# Altium PCB Local Master.PcbDoc (part 1 of 2)
Units mm, origin at the board's own origin, x right, y up, seen from the top; angles counter-clockwise.
Board outline 94 x 42.5 mm, 2 copper layers (Top Layer, Bottom Layer); 184 components, 131 nets, 483 pads, 96 vias.
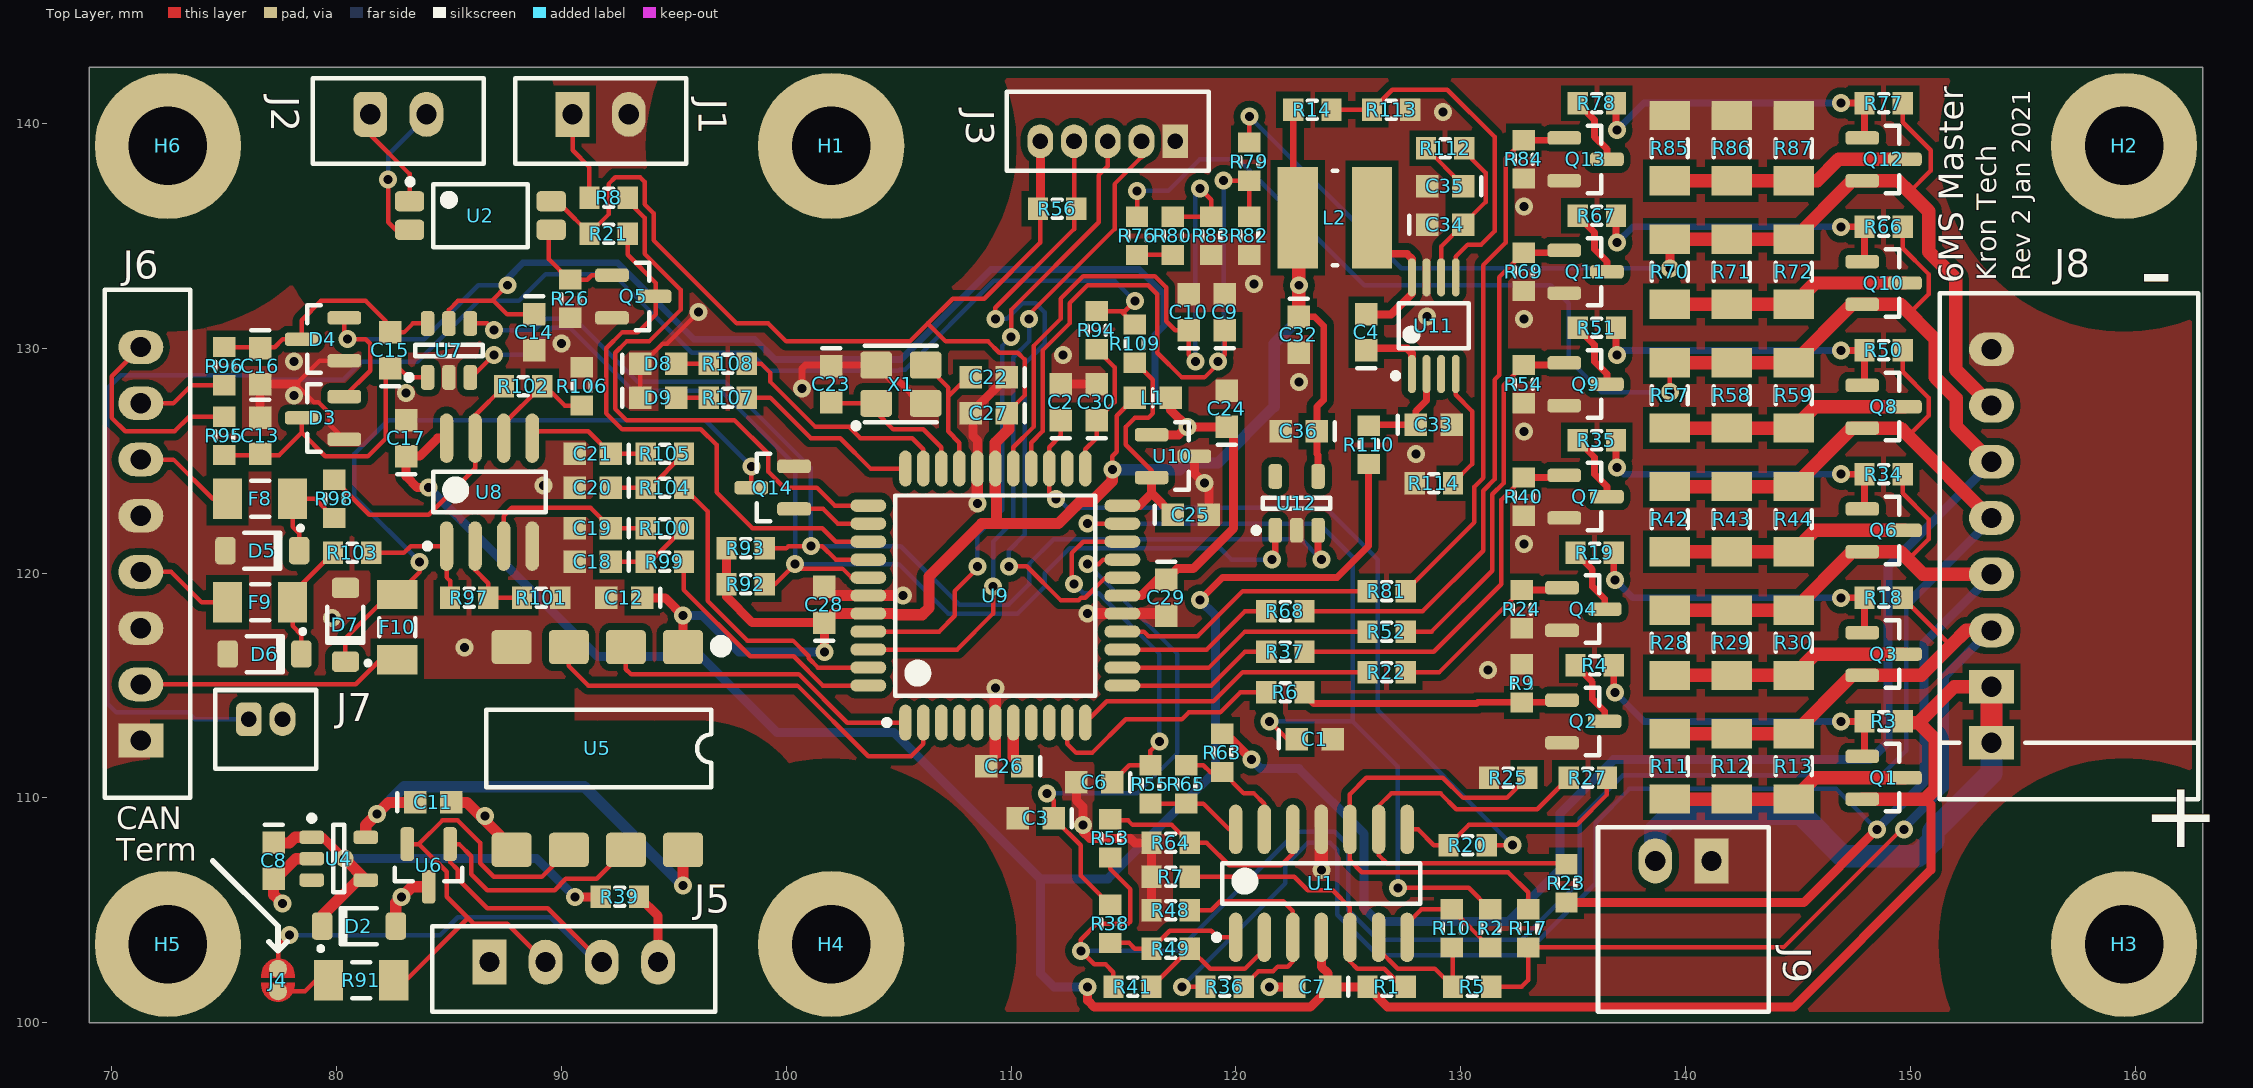
[diagram p0: Top Layer view]
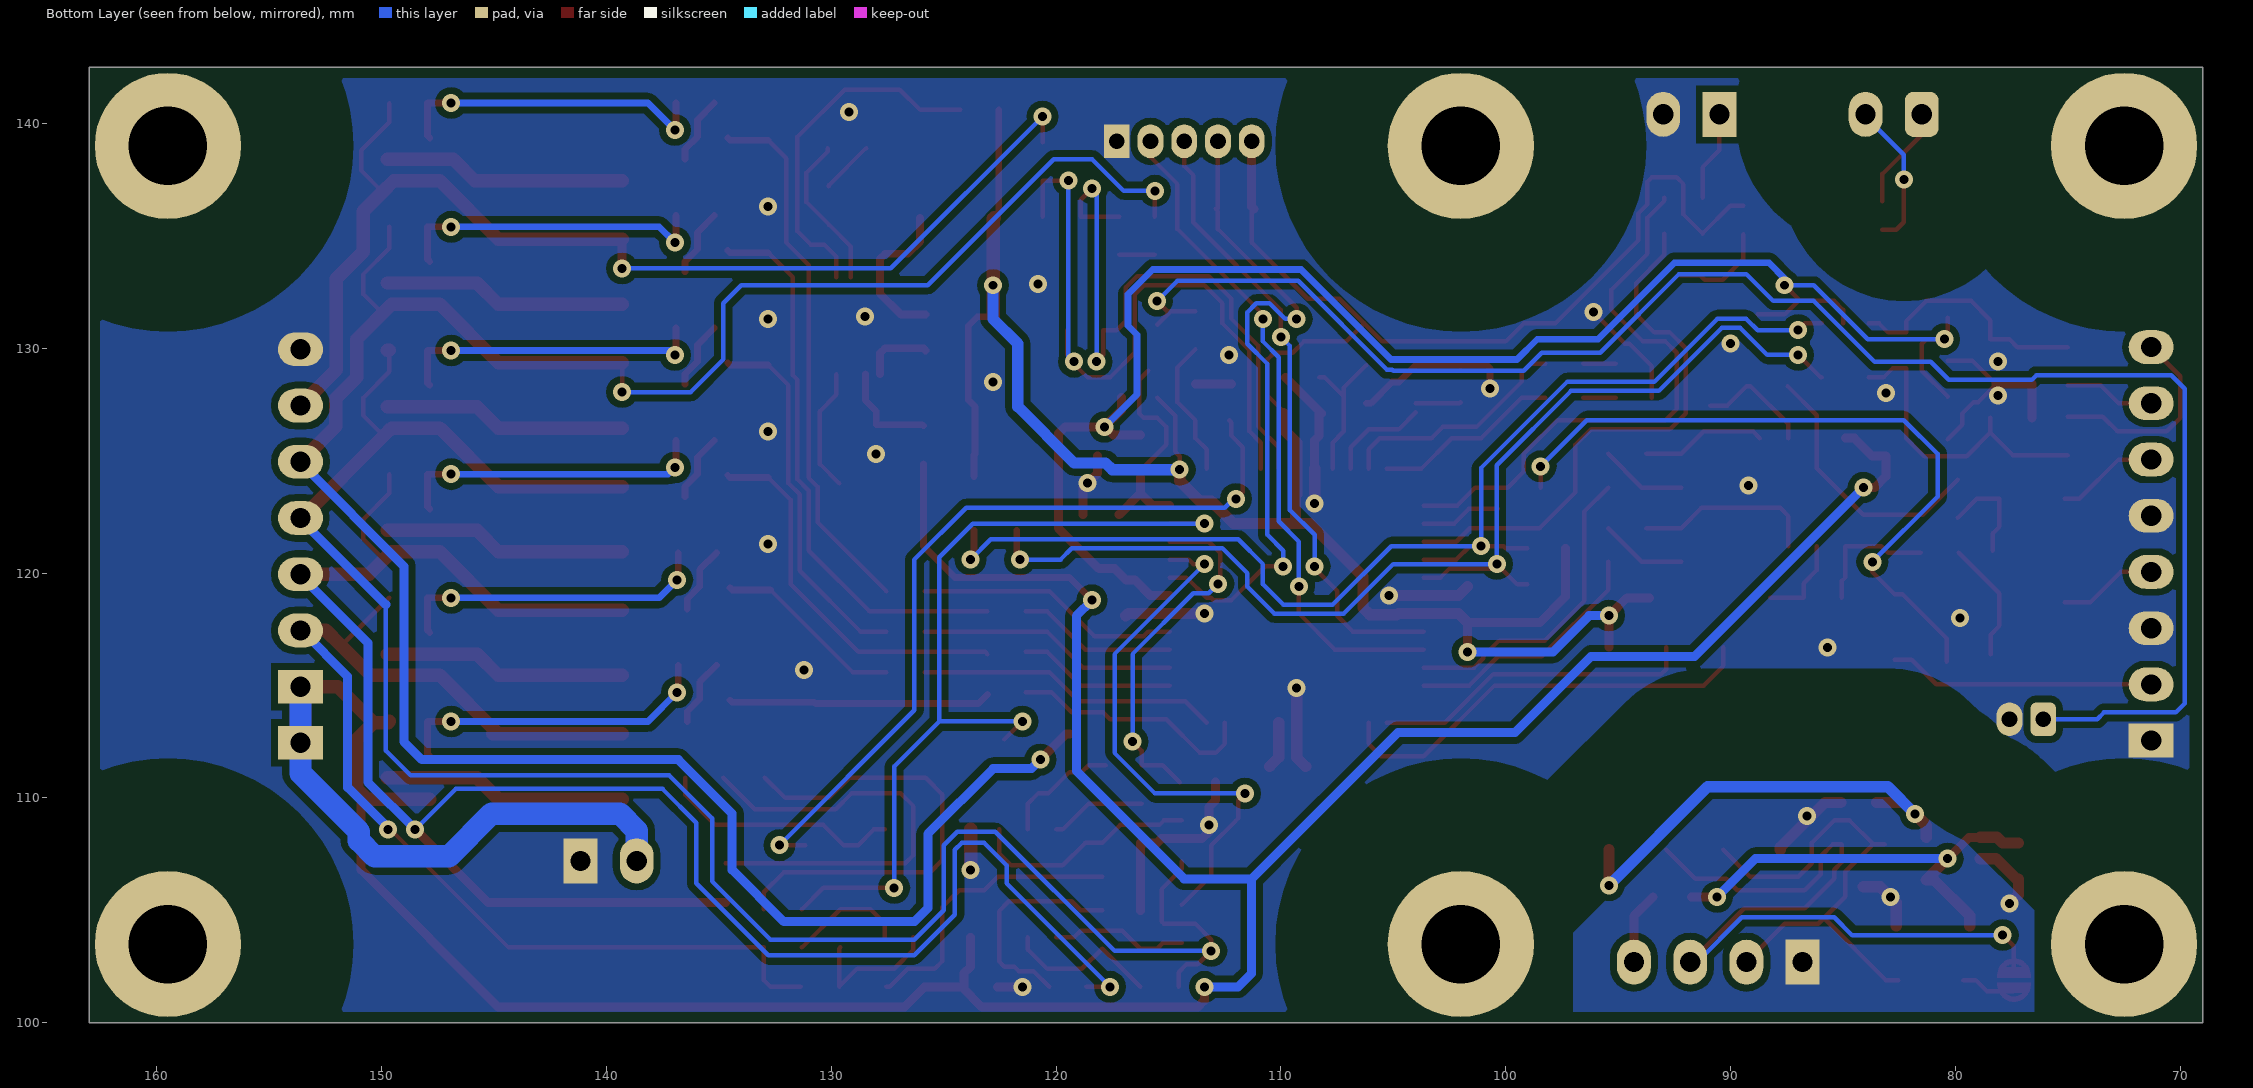
[diagram p1: Bottom Layer view, seen from below]

## Layer stack, top to bottom
Top Solder: solder mask 0.0102, Solder Resist, Dk 3.5
Top Layer: signal copper 0.0356
Dielectric1: dielectric 0.32, FR-4, Dk 4.8
Bottom Layer: signal copper 0.0356
Bottom Solder: solder mask 0.0102, Solder Resist, Dk 3.5

## Board outline
69,100 69,142.5 163,142.5 163,100

## Design rules (kind name [scope] priority, off if disabled: settings)
Clearance Clearance_HV [InNetClass('HV') vs NOT InNetClass('HV')] p1: gap=5 ignorepadtopadclearanceinfootprint=FALSE except(0: Arc-Hole Track-Hole SMDPad-Hole THPad-Hole Via-Hole Fill-Hole Poly-Hole Region-Hole Text-Hole)
Clearance Clearance_ISO [InNetClass('ISO') vs NOT InNetClass('ISO')] p2: gap=5 ignorepadtopadclearanceinfootprint=FALSE except(0: Arc-Hole Track-Hole SMDPad-Hole THPad-Hole Via-Hole Fill-Hole Poly-Hole Region-Hole Text-Hole)
Clearance Clearance_Plane [InPoly] p3: gap=0.3 ignorepadtopadclearanceinfootprint=FALSE except(0: Arc-Hole Track-Hole SMDPad-Hole THPad-Hole Via-Hole Fill-Hole Poly-Hole Region-Hole Text-Hole)
Clearance [All] p4: gap=0.2 ignorepadtopadclearanceinfootprint=FALSE except(0: Arc-Hole Track-Hole SMDPad-Hole THPad-Hole Via-Hole Fill-Hole Poly-Hole Region-Hole Text-Hole)
HoleSize [All] p1 off: absolutevalues=TRUE maxlimit=2.54 minlimit=0.025 maxpercent=80.000 minpercent=20.000
PolygonConnect PolygonConnect_Direct [IsVia    or (IsPad AND NOT OnLayer('Multi Layer'))] p1: connectstyle=Direct reliefconductorwidth=0.254 reliefentries=4 polygonreliefangle="90 Angle" airgapwidth=0.254
PolygonConnect [All] p2: connectstyle=Relief reliefconductorwidth=0.254 reliefentries=4 polygonreliefangle="90 Angle" airgapwidth=0.254
RoutingVias [All] p1: holewidth=0.3 width=0.6 viastyle="Through Hole" minholewidth=0.3 minwidth=0.6 maxholewidth=10 maxwidth=20
SilkToSilkClearance [All] p1 off: silktosilkclearance=0.254
SilkToSolderMaskClearance [IsPad] p1 off: minsilkscreentomaskgap=0.254 clearancetoexposedcopper=TRUE
SolderMaskExpansion [All] p1: expansion=0.102 istentingtop=FALSE
Width [All] p1: maxlimit=10 minlimit=0.2 preferedwidth=0.3
27 further rules are at their usual default settings.

## Classes and differential pairs
net class HV: ANALOG1 ANALOG1PWM ANALOG2 ANALOG2PWM AVDD BAL1 BAL2 BAL3 BAL4 BAL5 BAL6 CANRX CANTX CHGENABLE CHGENABLEDRV GND I2CCLK I2CDAT ICSPCLK ICSPDAT LEDG LEDR LOADEN1 LOADEN2 LOADEN3 LOADEN4 LOADEN5 LOADEN6 M\C\L\R\ NetC4_1 NetC4_2 NetC13_2 NetC15_2 NetC18_1 NetC19_1 NetC20_1 NetC21_1 NetC22_2 NetC23_2 NetC26_1 NetC33_1 NetC34_2 NetC35_1 NetD5_1 NetD6_1 NetD7_1 NetD8_2 NetD9_2 NetJ1_1 NetJ7_1 NetQ1_1 NetQ1_3 NetQ2_1 NetQ2_3 NetQ3_1 NetQ3_3 NetQ4_1 NetQ4_3 NetQ5_1 NetQ6_1 NetQ6_3 NetQ7_1 NetQ7_3 NetQ8_1 NetQ8_3 NetQ9_1 NetQ9_3 NetQ10_1 NetQ10_3 NetQ11_1 NetQ11_3 NetQ12_1 NetQ12_3 NetQ13_1 NetQ13_3 NetR1_2 NetR2_1 NetR5_2 NetR14_1 NetR17_2 NetR20_1 NetR23_2 NetR36_2 NetR38_1 NetR41_2 NetR53_2 NetR55_1 NetR63_2 NetR76_1 NetR97_1 NetR97_2 NetR98_1 NetR102_1 NetR114_2 NetU9_3 NetU9_4 NetU9_5 NetU9_8 NetU9_9 NetU9_24 NetU11_3 NetU12_5 RX SHUNT+ SHUNT- TEMPSENSE TX VBAT1 VBAT2 VBAT3 VBAT4 VBAT5 VBAT6 VCC VREF
net class LV: CANH CANL CANPWR CGND CVDD NetC8_1 NetJ4_1 NetU4_3
net class ISO: NetJ2_1 NetJ2_2
net class CHASSIS: CHASSIS1 CHASSIS2 CHASSIS3 CHASSIS4 CHASSIS5 CHASSIS6

## Components (designator, comment, footprint, x,y, rotation, side; value= is the part's Value field where it differs from the comment)
C1 "Cap Ceramic 0.1u 25V X7R 0603" CAPC1608N-0603 123.5,112.6 r0 top value=0.1u
C2 "Cap Ceramic 0.1u 25V X7R 0603" CAPC1608N-0603 112.2,127.6 r90 top value=0.1u
C3 "Cap Ceramic 0.1u 25V X7R 0603" CAPC1608N-0603 111.1,109.1 r180 top value=0.1u
C4 "Cap Ceramic 10n 50V X7R 0603" CAPC1608N-0603 125.8,130.7 r90 top value=10n
C6 "Cap Ceramic 0.1u 25V X7R 0603" CAPC1608N-0603 113.7,110.7 r180 top value=0.1u
C7 "Cap Ceramic 0.1u 50V X7R 0603" CAPC1608N-0603 123.4,101.6 r180 top value=0.1u
C8 "Cap Ceramic 0.1u 50V X7R 0603" CAPC1608N-0603 77.2,107.2 r270 top value=0.1u
C9 "Cap Ceramic 0.1u 25V X7R 0603" CAPC1608N-0603 119.5,131.6 r90 top value=0.1u
C10 "Cap Ceramic 0.1u 25V X7R 0603" CAPC1608N-0603 117.9,131.6 r90 top value=0.1u
C11 "Cap Ceramic 0.1u 25V X7R 0603" CAPC1608N-0603 84.3,109.8 r0 top value=0.1u
C12 "Cap Ceramic 0.1u 25V X7R 0603" CAPC1608N-0603 92.8,118.9 r180 top value=0.1u
C13 "Cap Ceramic 0.1u 25V X7R 0603" CAPC1608N-0603 76.6,126.1 r270 top value=0.1u
C14 "Cap Ceramic 1u 25V X5R 0603" CAPC1608N-0603 88.8,130.7 r270 top value=1u
C15 "Cap Ceramic 1u 25V X5R 0603" CAPC1608N-0603 82.4,129.9 r90 top value=1u
C16 "Cap Ceramic 0.1u 25V X7R 0603" CAPC1608N-0603 76.6,129.2 r270 top value=0.1u
C17 "Cap Ceramic 0.1u 50V X7R 0603" CAPC1608N-0603 83.1,126 r90 top value=0.1u
C18 "Cap Ceramic 1u 25V X5R 0603" CAPC1608N-0603 91.4,120.5 r180 top value=1u
C19 "Cap Ceramic 0.1u 25V X7R 0603" CAPC1608N-0603 91.4,122 r180 top value=0.1u
C20 "Cap Ceramic 1u 25V X5R 0603" CAPC1608N-0603 91.4,123.8 r180 top value=1u
C21 "Cap Ceramic 0.1u 25V X7R 0603" CAPC1608N-0603 91.4,125.3 r180 top value=0.1u
C22 "Cap Ceramic 20p 50V C0G 0603" CAPC1608N-0603 109,128.7 r180 top value=20p
C23 "Cap Ceramic 20p 50V C0G 0603" CAPC1608N-0603 102,128.4 r270 top value=20p
C24 "Cap Ceramic 0.1u 25V X7R 0603" CAPC1608N-0603 119.6,127.3 r90 top value=0.1u
C25 "Cap Ceramic 0.1u 25V X7R 0603" CAPC1608N-0603 118,122.6 r0 top value=0.1u
C26 "Cap Ceramic 10u 6.3V X5R 0603" CAPC1608N-0603 109.7,111.4 r180 top value=10uF
C27 "Cap Ceramic 0.1u 25V X7R 0603" CAPC1608N-0603 109,127.1 r180 top value=0.1u
C28 "Cap Ceramic 0.1u 25V X7R 0603" CAPC1608N-0603 101.7,118.6 r90 top value=0.1u
C29 "Cap Ceramic 1u 25V X5R 0603" CAPC1608N-0603 116.9,118.9 r270 top value=1u
C30 "Cap Ceramic 1u 25V X5R 0603" CAPC1608N-0603 113.8,127.6 r90 top value=1u
C32 "Cap Ceramic 10u 6.3V X5R 0603" CAPC1608N-0603 122.8,130.6 r270 top value=10uF
C33 "Cap Ceramic 1u 50V X5R 0603" CAPC1608N-0603 128.8,126.6 r0 top value=1u
C34 "Cap Ceramic 100pF 50V C0G 0402" CAPC1608N-0603 129.3,135.5 r0 top value=100pF
C35 "Cap Ceramic 0.1u 25V X7R 0603" CAPC1608N-0603 129.3,137.2 r180 top value=0.1u
C36 "Cap Ceramic 0.1u 25V X7R 0603" CAPC1608N-0603 122.8,126.3 r180 top value=0.1u
D2 "Diode Zener 24V 0.5W SOD-123" SOD-123 81,104.3 r0 top value=24V
D3 "Diode Schottky 200mA 30V Series SOT-23" SOT23-3N 79.4,126.9 r180 top value="200mA 30V"
D4 "Diode Schottky 200mA 30V Series SOT-23" SOT23-3N 79.4,130.4 r180 top value="200mA 30V"
D5 "Diode Zener 10V 0.5W SOD-123" SOD-123 76.7,121 r180 top value=10V
D6 "Diode Zener 10V 0.5W SOD-123" SOD-123 76.8,116.4 r180 top value=10V
D7 "Diode Zener 10V 0.5W SOD-123" SOD-123 80.4,117.7 r90 top value=10V
D8 "LED Red 160° 0603" CAPC1608N-0603 94.3,129.3 r0 top value="LS Q971-KN-1"
D9 "LED Green 160° 0603" CAPC1608N-0603 94.3,127.8 r0 top value="LG Q971-KN-1"
F8 "Fuse PTC 50mA 60V 1206" RESC3216N-1206 76.6,123.3 r180 top value=50mA
F9 "Fuse PTC 50mA 60V 1206" RESC3216N-1206 76.6,118.7 r180 top value=50mA
F10 "Fuse PTC 50mA 60V 1206" RESC3216N-1206 82.7,117.6 r270 top value=50mA
H1 "Mounting Hole" "HOLE MOUNTING 3MM"#1 103.2,138.6 r0 top
H2 "Mounting Hole" "HOLE MOUNTING 3MM"#2 160.7,138.8 r0 top
H3 "Mounting Hole" "HOLE MOUNTING 3MM"#3 188.4,105.6 r0 top
H4 "Mounting Hole" "HOLE MOUNTING 3MM"#4 102.7,103.4 r0 top
H5 "Mounting Hole" "HOLE MOUNTING 3MM"#5 72.5,103.5 r0 top
H6 "Mounting Hole" "HOLE MOUNTING 3MM"#5 72.5,139 r0 top
J1 "Conn Header 2.5mm Vert 2-Pos EH" B2B-EH#1 91.75,140.4 r0 top value=B2B-EH-A(LF)(SN)
J2 "Conn Header 2.5mm Vert 2-Pos EH" B2B-EH#2 82.75,140.4 r0 top value=B2B-EH-A(LF)(SN)
J3 "Conn Header 1.5mm Vert 5-Pos ZH" B5B-ZR 114.3,139.2 r180 top value=B5B-ZR(LF)(SN)
J4 "Jumper Solder Blob" "JUMPER SOLDER BLOB" 77.4,101.9 r90 top
J5 "Conn Header 2.5mm Vert 4-Pos EH" B4B-EH 90.55,102.7 r0 top value=B4B-EH-A(LF)(SN)
J6 "Conn Header 2.5mm Vert 8-Pos EH" B8B-EH 71.3,121.3 r90 top value=B8B-EH-A(LF)(SN)
J7 "Conn Header 1.5mm Vert 2-Pos ZH" B2B-ZR 76.85,113.5 r0 top value=B2B-ZR(LF)(SN)
J8 "Conn Header 2.5mm RA 7-Pos XH" S7B-XH&78B-XH-REV 153.6,122.45 r270 top value=S7B-XH-A(LF)(SN)
J9 "Conn Header 2.5mm RA 2-Pos EH" S2B-EH 139.9,107.2 r180 top value=S2B-EH(LF)(SN)
L1 "Ind Bead 600R 1A 0603" INDC1608N-0603 116.3,127.8 r0 top value=600R
L2 "Ind 1mH 90mA SDR0403-102KL" SDR0403 124.4,135.8 r180 top value="1mH 90mA"
Q1 "Tran PNP Darl 30V 500mA SOT-23" SOT23-3N 148.8,110.9 r0 top value=MMBTA64-7-F
Q2 "Tran NPN 40V 200mA SOT-23" SOT23-3N 135.45,113.4 r0 top value=MMBT3904
Q3 "Tran PNP Darl 30V 500mA SOT-23" SOT23-3N 148.8,116.4 r0 top value=MMBTA64-7-F
Q4 "Tran NPN 40V 200mA SOT-23" SOT23-3N 135.45,118.4 r0 top value=MMBT3904
Q5 "Tran NPN 40V 200mA SOT-23" SOT23-3N 93.2,132.3 r0 top value=MMBT3904
Q6 "Tran PNP Darl 30V 500mA SOT-23" SOT23-3N 148.8,121.9 r0 top value=MMBTA64-7-F
Q7 "Tran NPN 40V 200mA SOT-23" SOT23-3N 135.55,123.4 r0 top value=MMBT3904
Q8 "Tran PNP Darl 30V 500mA SOT-23" SOT23-3N 148.8,127.4 r0 top value=MMBTA64-7-F
Q9 "Tran NPN 40V 200mA SOT-23" SOT23-3N 135.55,128.4 r0 top value=MMBT3904
Q10 "Tran PNP Darl 30V 500mA SOT-23" SOT23-3N 148.8,132.9 r0 top value=MMBTA64-7-F
Q11 "Tran NPN 40V 200mA SOT-23" SOT23-3N 135.55,133.4 r0 top value=MMBT3904
Q12 "Tran PNP Darl 30V 500mA SOT-23" SOT23-3N 148.8,138.4 r0 top value=MMBTA64-7-F
Q13 "Tran NPN 40V 200mA SOT-23" SOT23-3N 135.55,138.4 r0 top value=MMBT3904
Q14 "Tran N-MOSFET 60V 115mA SOT-23" SOT23-3N 99.4,123.8 r180 top value=2N7002
R1 "Res 499K 1/10W 1% 0603" RESC1608N-0603 126.7,101.6 r0 top value=499K
R2 "Res 10.0K 1/10W 1% 0603" RESC1608N-0603 131.3,104.2 r90 top value=10K0
R3 "Res 100K 1/10W 1% 0603" RESC1608N-0603 148.8,113.4 r0 top value=100K
R4 "Res 280K 1/10W 1% 0603" RESC1608N-0603 135.95,115.9 r180 top value=280K
R5 "Res 499K 1/10W 1% 0603" RESC1608N-0603 130.5,101.6 r180 top value=499K
R6 "Res 10.0K 1/10W 1% 0603" RESC1608N-0603 122.2,114.7 r180 top value=10K0
R7 "Res 200K 1/10W 1% 0603" RESC1608N-0603 117.1,106.5 r0 top value=200K
R8 "Res 1.00K 1/10W 1% 0603" RESC1608N-0603 92.1,136.7 r0 top value=1K00
R9 "Res 10.0K 1/10W 1% 0603" RESC1608N-0603 132.7,115.1 r270 top value=10K0
R10 "Res 200K 1/10W 1% 0603" RESC1608N-0603 129.6,104.2 r90 top value=200K
R11 "Res 121R 1/4W 1% 1206" RESC3216N-1206 139.3,111.4 r270 top value=121R
R12 "Res 121R 1/4W 1% 1206" RESC3216N-1206 142.05,111.4 r270 top value=121R
R13 "Res 121R 1/4W 1% 1206" RESC3216N-1206 144.8,111.4 r270 top value=121R
R14 "Res 31.6K 1/10W 1% 0603" RESC1608N-0603 123.4,140.6 r180 top value=31K6
R17 "Res 499K 1/10W 1% 0603" RESC1608N-0603 133,104.2 r90 top value=499K
R18 "Res 100K 1/10W 1% 0603" RESC1608N-0603 148.8,118.9 r0 top value=100K
R19 "Res 280K 1/10W 1% 0603" RESC1608N-0603 135.95,120.9 r180 top value=280K
R20 "Res 10.0K 1/10W 1% 0603" RESC1608N-0603 130.3,107.9 r0 top value=10K0
R21 "Res 2.32K 1/10W 1% 0603" RESC1608N-0603 92.1,135.1 r180 top value=2K32
R22 "Res 10.0K 1/10W 1% 0603" RESC1608N-0603 126.7,115.6 r180 top value=10K0
R23 "Res 499K 1/10W 1% 0603" RESC1608N-0603 134.7,106.2 r90 top value=499K
R24 "Res 10.0K 1/10W 1% 0603" RESC1608N-0603 132.7,118.4 r90 top value=10K0
R25 "Res 200K 1/10W 1% 0603" RESC1608N-0603 132.1,110.9 r0 top value=200K
R26 "Res 4.99K 1/10W 1% 0603" RESC1608N-0603 90.4,132.2 r90 top value=4K99
R27 "Res 200K 1/10W 1% 0603" RESC1608N-0603 135.65,110.9 r0 top value=200K
R28 "Res 121R 1/4W 1% 1206" RESC3216N-1206 139.3,116.9 r270 top value=121R
R29 "Res 121R 1/4W 1% 1206" RESC3216N-1206 142.05,116.9 r270 top value=121R
R30 "Res 121R 1/4W 1% 1206" RESC3216N-1206 144.8,116.9 r270 top value=121R
R34 "Res 100K 1/10W 1% 0603" RESC1608N-0603 148.8,124.4 r0 top value=100K
R35 "Res 280K 1/10W 1% 0603" RESC1608N-0603 136.05,125.9 r180 top value=280K
R36 "Res 499K 1/10W 1% 0603" RESC1608N-0603 119.5,101.6 r0 top value=499K
R37 "Res 10.0K 1/10W 1% 0603" RESC1608N-0603 122.2,116.5 r180 top value=10K0
R38 "Res 10.0K 1/10W 1% 0603" RESC1608N-0603 114.4,104.4 r90 top value=10K0
R39 "Res 120R 1/10W 1% 0603" RESC1608N-0603 92.6,105.6 r0 top value=120R
R40 "Res 10.0K 1/10W 1% 0603" RESC1608N-0603 132.8,123.4 r90 top value=10K0
R41 "Res 499K 1/10W 1% 0603" RESC1608N-0603 115.4,101.6 r0 top value=499K
R42 "Res 121R 1/4W 1% 1206" RESC3216N-1206 139.3,122.4 r270 top value=121R
R43 "Res 121R 1/4W 1% 1206" RESC3216N-1206 142.05,122.4 r270 top value=121R
R44 "Res 121R 1/4W 1% 1206" RESC3216N-1206 144.8,122.4 r270 top value=121R
R48 "Res 200K 1/10W 1% 0603" RESC1608N-0603 117.1,105 r0 top value=200K
R49 "Res 200K 1/10W 1% 0603" RESC1608N-0603 117.1,103.3 r180 top value=200K
R50 "Res 100K 1/10W 1% 0603" RESC1608N-0603 148.8,129.9 r0 top value=100K
R51 "Res 100K 1/10W 1% 0603" RESC1608N-0603 136.05,130.9 r180 top value=100K
R52 "Res 10.0K 1/10W 1% 0603" RESC1608N-0603 126.7,117.4 r180 top value=10K0
R53 "Res 499K 1/10W 1% 0603" RESC1608N-0603 114.4,108.2 r90 top value=499K
R54 "Res 10.0K 1/10W 1% 0603" RESC1608N-0603 132.8,128.4 r90 top value=10K0
R55 "Res 10.0K 1/10W 1% 0603" RESC1608N-0603 116.2,110.6 r90 top value=10K0
R56 "Res 10.0K 1/10W 1% 0603" RESC1608N-0603 112.05,136.2 r180 top value=10K0
R57 "Res 121R 1/4W 1% 1206" RESC3216N-1206 139.3,127.9 r270 top value=121R
R58 "Res 121R 1/4W 1% 1206" RESC3216N-1206 142.05,127.9 r270 top value=121R
R59 "Res 121R 1/4W 1% 1206" RESC3216N-1206 144.8,127.9 r270 top value=121R
R63 "Res 499K 1/10W 1% 0603" RESC1608N-0603 119.4,112 r270 top value=499K
R64 "Res 200K 1/10W 1% 0603" RESC1608N-0603 117.1,108 r0 top value=200K
R65 "Res 200K 1/10W 1% 0603" RESC1608N-0603 117.8,110.6 r270 top value=200K
R66 "Res 100K 1/10W 1% 0603" RESC1608N-0603 148.8,135.4 r0 top value=100K
R67 "Res 100K 1/10W 1% 0603" RESC1608N-0603 136.05,135.9 r180 top value=100K
R68 "Res 10.0K 1/10W 1% 0603" RESC1608N-0603 122.2,118.3 r180 top value=10K0
R69 "Res 10.0K 1/10W 1% 0603" RESC1608N-0603 132.8,133.4 r90 top value=10K0
R70 "Res 121R 1/4W 1% 1206" RESC3216N-1206 139.3,133.4 r270 top value=121R
R71 "Res 121R 1/4W 1% 1206" RESC3216N-1206 142.05,133.4 r270 top value=121R
R72 "Res 121R 1/4W 1% 1206" RESC3216N-1206 144.8,133.4 r270 top value=121R
R76 "Res 100K 1/10W 1% 0603" RESC1608N-0603 115.6,135 r90 top value=100K
R77 "Res 100K 1/10W 1% 0603" RESC1608N-0603 148.8,140.9 r0 top value=100K
R78 "Res 3.32K 1/10W 1% 0603" RESC1608N-0603 136.05,140.9 r180 top value=3K32
R79 "Res 150K 1/10W 1% 0603" RESC1608N-0603 120.6,138.3 r90 top value=150K
R80 "Res 280K 1/10W 1% 0603" RESC1608N-0603 117.2,135 r270 top value=280K
R81 "Res 10.0K 1/10W 1% 0603" RESC1608N-0603 126.7,119.2 r180 top value=10K0
R82 "Res 100K 1/10W 1% 0603" RESC1608N-0603 120.6,135 r90 top value=100K
R83 "Res 100K 1/10W 1% 0603" RESC1608N-0603 118.9,135 r90 top value=100K
R84 "Res 10.0K 1/10W 1% 0603" RESC1608N-0603 132.8,138.4 r90 top value=10K0
R85 "Res 121R 1/4W 1% 1206" RESC3216N-1206 139.3,138.9 r270 top value=121R
R86 "Res 121R 1/4W 1% 1206" RESC3216N-1206 142.05,138.9 r270 top value=121R
R87 "Res 121R 1/4W 1% 1206" RESC3216N-1206 144.8,138.9 r270 top value=121R
R91 "Res 121R 1/4W 1% 1206" RESC3216N-1206 81.1,101.9 r180 top value=121R
R92 "Res 10.0K 1/10W 1% 0603" RESC1608N-0603 98.2,119.5 r180 top value=10K0
R93 "Res 10.0K 1/10W 1% 0603" RESC1608N-0603 98.2,121.1 r180 top value=10K0
R94 "Res 10.0K 1/10W 1% 0603" RESC1608N-0603 113.8,130.8 r90 top value=10K0
R95 "Res 499R 1/10W 1% 0603" RESC1608N-0603 75,126.1 r270 top value=499R
R96 "Res 499R 1/10W 1% 0603" RESC1608N-0603 75,129.2 r90 top value=499R
R97 "Res 66.5K 1/10W 1% 0603" RESC1608N-0603 85.9,118.9 r180 top value=66K5
R98 "Res 100R 1/10W 1% 0603" RESC1608N-0603 79.9,123.3 r270 top value=100R
R99 "Res 10.0K 1/10W 1% 0603" RESC1608N-0603 94.6,120.5 r180 top value=10K0
R100 "Res 100K 1/10W 1% 0603" RESC1608N-0603 94.6,122 r180 top value=100K
R101 "Res 100K 1/10W 1% 0603" RESC1608N-0603 89.1,118.9 r180 top value=100K
R102 "Res 66.5K 1/10W 1% 0603" RESC1608N-0603 88.3,128.3 r180 top value=66K5
R103 "Res 100R 1/10W 1% 0603" RESC1608N-0603 80.7,120.9 r180 top value=100R
R104 "Res 10.0K 1/10W 1% 0603" RESC1608N-0603 94.6,123.8 r180 top value=10K0
R105 "Res 100K 1/10W 1% 0603" RESC1608N-0603 94.6,125.3 r180 top value=100K
R106 "Res 100K 1/10W 1% 0603" RESC1608N-0603 90.9,128.3 r270 top value=100K
R107 "Res 120R 1/10W 1% 0603" RESC1608N-0603 97.4,127.8 r180 top value=120R
R108 "Res 120R 1/10W 1% 0603" RESC1608N-0603 97.4,129.3 r180 top value=120R
R109 "Res 10.0K 1/10W 1% 0603" RESC1608N-0603 115.5,130.2 r270 top value=10K0
R110 "Res 120R 1/10W 1% 0603" RESC1608N-0603 125.9,125.7 r90 top value=120R
R112 "Res 10.0K 1/10W 1% 0603" RESC1608N-0603 129.3,138.9 r180 top value=10K0
R113 "Res 10.0K 1/10W 1% 0603" RESC1608N-0603 126.9,140.6 r180 top value=10K0
R114 "Res 499K 1/10W 1% 0603" RESC1608N-0603 128.8,124 r0 top value=499K
U1 "IC Op-Amp Low Power RRIO 32V 14-SOIC" SOIC127P600-14N 123.8,106.2 r90 top value=LP324DR
U2 "IC Optocoupler Bi-Di LED 80-300% SOIC4" MFP127P4.4-4 86.4,135.9 r0 top value=80-300%
U4 "IC Voltage Reg LDO 5V SOT-23-5" SOT23-5N 80.1,107.3 r0 top value=5V
U5 "IC Driver CAN 8-SOIC" SMD-8 91.6,112.2 r270 top value=ISO1050DUBR
U6 "IC ESD Protector CAN SOT23" SOT23-3N 84.1,107 r270 top value=PESD1CAN,215
U7 "MCP3425A0T-E/CH" SOT23-6N 85,129.9 r90 top
U8 "IC Op-Amp Low Power RRIO 32V 8-SOIC" SOIC127P600-8N 86.8,123.6 r90 top
U9 "IC Micro DSPIC33EP32GP504-I/PT 44-TQFP" TQFP44-0.8 109.3,119 r90 top value=DSPIC33EP32GP504-I/PT
U10 "IC Voltage Ref 2.048V 0.3% uPwr SOT-23" SOT23-3N 117.2,125.2 r0 top value=2.048V
U11 "IC Reg Buck 4.7-60V 50mA 8-MSOP" MSOP65P3.0-8N 128.8,131 r90 top value=TPS54062DGKR
U12 "IC Mem EEPROM 16Kb (2K x 8) I2C SOT-23-5" SOT23-5N 122.7,123.1 r90 top value=24LC16BT-I/OT
X1 "Xtal 20MHz 10pF 3.2X2.5MM" XTAL3.2X2.5 105.1,128.4 r0 top value=20MHz

## Footprints (in the part's own frame and the unit in brackets; to place one, negate y for a bottom-side part, rotate by r counter-clockwise, add the part's x,y. Pads: shape width x height; smd on the part's side, far side on the other; paste and mask are expansions set on the pad)
B2B-EH#1 [mm] "CONN HEADER EH TOP 2POS 2.5MM"
  rect 1.5x2 hole 0.9: 1(-1.25,0)
  oval 1.5x2 hole 0.9: 2(1.25,0)
  silkscreen extent -3.8,-2.2 3.8,1.6, body extent -3.75,-2.2 3.75,1.6, height 6
B2B-EH#2 [mm] "CONN HEADER EH TOP 2POS 2.5MM"
  rrect50% 1.5x2 hole 0.9: 1(-1.25,0)
  oval 1.5x2 hole 0.9: 2(1.25,0)
  silkscreen extent -3.8,-2.2 3.8,1.6, body extent -3.75,-2.2 3.75,1.6, height 6
B2B-ZR [mm] "CONN HEADER ZH TOP 2POS 1.5MM"
  rrect50% 1.15x1.5 hole 0.7: 1(-0.75,0)
  oval 1.15x1.5 hole 0.7: 2(0.75,0)
  silkscreen extent -2.25,-2.2 2.25,1.3, body extent -2.25,-2.2 2.25,1.3, height 4.5
B4B-EH [mm] "CONN HEADER EH TOP 4POS 2.5MM"
  rect 1.5x2 hole 0.9: 1(-3.75,0)
  oval 1.5x2 hole 0.9: 2(-1.25,0) 3(1.25,0) 4(3.75,0)
  silkscreen extent -6.3,-2.2 6.3,1.6, body extent -6.25,-2.2 6.25,1.6, height 6
B5B-ZR [mm] "CONN HEADER ZH TOP 5POS 1.5MM"
  rect 1.15x1.5 hole 0.7: 1(-3,0)
  oval 1.15x1.5 hole 0.7: 2(-1.5,0) 3(0,0) 4(1.5,0) 5(3,0)
  silkscreen extent -4.5,-2.2 4.5,1.3, body extent -4.5,-2.2 4.5,1.3, height 4.5
B8B-EH [mm] "CONN HEADER EH TOP 8POS 2.5MM"
  rect 1.5x2 hole 0.9: 1(-8.75,0)
  oval 1.5x2 hole 0.9: 2(-6.25,0) 3(-3.75,0) 4(-1.25,0) 5(1.25,0) 6(3.75,0) 7(6.25,0) 8(8.75,0)
  silkscreen extent -11.3,-2.2 11.3,1.6, body extent -11.25,-2.2 11.25,1.6, height 6
CAPC1608N-0603 [mm] "Chip Capacitor, Body 1.6x0.8mm, IPC Medium Density"
  rect 1x1 smd: 1(-0.8,0) 2(0.8,0)
  silkscreen extent -1.6,-0.4 -1.6,0.4, body extent -0.87,-0.48 0.87,0.48, height 0.85
"HOLE MOUNTING 3MM"#1 [mm] "3mm hole with 300mil pad"
  round 6.5 hole 3.5: 1(-1.2,0.4)
"HOLE MOUNTING 3MM"#2 [mm] "3mm hole with 300mil pad"
  round 6.5 hole 3.5: 1(-1.2,0.2)
"HOLE MOUNTING 3MM"#3 [mm] "3mm hole with 300mil pad"
  round 6.5 hole 3.5: 1(-28.9,-2.1)
"HOLE MOUNTING 3MM"#4 [mm] "3mm hole with 300mil pad"
  round 6.5 hole 3.5: 1(-0.7,0.1)
"HOLE MOUNTING 3MM"#5 [mm] "3mm hole with 300mil pad"
  round 6.5 hole 3.5: 1(0,0)
INDC1608N-0603 [mm] "Chip Inductor, Body 1.6x0.8mm, IPC Medium Density"
  rect 1x1 smd: 1(-0.8,0) 2(0.8,0)
  silkscreen extent 0,-0.4 0,0.4, body extent -0.87,-0.48 0.87,0.48, height 0.71
"JUMPER SOLDER BLOB" [mm]
  round 0.8 smd: 1(-0.5,0) 2(0.5,0)
  Top Layer region: 0.575,0.55 0.175,0.55 0.175,-0.55 0.575,-0.55
  Top Layer region: 0.225,0.75 0.1,0.75 0.1,-0.75 0.225,-0.75
  Top Layer region: -0.225,-0.75 -0.1,-0.75 -0.1,0.75 -0.225,0.75
  Top Layer region: -0.575,-0.55 -0.175,-0.55 -0.175,0.55 -0.575,0.55
  Top Layer lines w0.25: -0.225,0.625 ccw(c-0.225,0) -0.5,-0.561 ccw(c-0.225,0) -0.225,-0.625 ; 0.225,0.625 cw(c0.225,0) 0.85,0 cw(c0.225,0) 0.225,-0.625
MFP127P4.4-4 [mm] "Mini Flat Pack, 4-Leads, Body 4.4x2.8mm, Pitch 1.27mm"
  rrect40% 1.3x0.9 smd: 1(-3.15,0.635) 2(-3.15,-0.635) 3(3.15,-0.635) 4(3.15,0.635)
  silkscreen extent -3.25,-1.4 2.1,1.62, body extent -2.2,-1.4 2.2,1.4, height 2.1
MSOP65P3.0-8N [mm] "Mini SO-8, 3.0mm body width, 8 pin"
  oval 1.7x0.35 smd: 1(-2.15,0.975) 2(-2.15,0.325) 3(-2.15,-0.325) 4(-2.15,-0.975) 5(2.15,-0.975) 6(2.15,-0.325) 7(2.15,0.325) 8(2.15,0.975)
  silkscreen extent -2.35,-1.55 1,1.82, body extent -1.6,-1.55 1.6,1.55, height 1.1
RESC1608N-0603 [mm] "Chip Resistor, Body 1.6x0.8mm, IPC Medium Density"
  rect 0.9x1 smd: 1(-0.85,0) 2(0.85,0)
  silkscreen extent -0.2,-0.4 0.2,0.4, body extent -0.85,-0.48 0.85,0.48, height 0.6
RESC3216N-1206 [mm] "Chip Resistor, Body 3.2x1.6mm, IPC Medium Density"
  rect 1.3x1.8 smd: 1(-1.45,0) 2(1.45,0)
  silkscreen extent -0.4,-0.8 0.4,0.8, body extent -1.68,-0.87 1.68,0.87, height 0.71
S2B-EH [mm] "CONN HEADER EH SIDE 2POS 2.5MM"
  rect 1.5x2 hole 0.9: 1(-1.25,0)
  oval 1.5x2 hole 0.9: 2(1.25,0)
  silkscreen extent -3.8,-1.5 3.8,6.7, body extent -3.75,-1.5 3.75,6.7, height 4.2
S7B-XH&78B-XH-REV [mm] "CONN HEADER XH SIDE 7 OR 8POS 2.5MM"
  rect 1.5x2 hole 0.9: 0(10,0) 1(7.5,0)
  oval 1.5x2 hole 0.9: 2(5,0) 3(2.5,0) 4(0,0) 5(-2.5,0) 6(-5,0) 7(-7.5,0)
  silkscreen extent -10,-2.3 12.5,9.2, body extent -9.95,-2.3 9.95,9.2, height 6.15
SDR0403 [mm] "Precision Wire Wound Inductor, 2-Leads, Body 4.5Dx3.2mmH"
  rect 1.8x4.5 smd: 1(-1.65,0) 2(1.65,0)
  silkscreen extent -0.1,-2.1 0.1,2.1, body extent -2.25,-2.25 2.25,2.25, height 3.2
SMD-8 [mil] "Surface Mount DIP, 8-Pin"
  rrect25% 60x70 smd: 1(-177.5,150) 2(-177.5,50) 3(-177.5,-50) 4(-177.5,-150) 5(177.5,-150) 6(177.5,-50) 7(177.5,50) 8(177.5,150)
  silkscreen extent -189,-194 68,226, body extent -150,-200 150,200, height 150
SOD-123 [mil] "Small Outline Diode"
  rrect40% 36x48 smd: 1(-64.5,0) 2(64.5,0)
  silkscreen extent -71,-43 31,31, body extent -55,-35 55,35, height 53
SOIC127P600-8N [mm] "SOIC, 8-Leads, Body 4.9x3.9mm, Pitch 1.27mm, IPC Medium Density"
  oval 2.2x0.6 smd: 1(-2.4,1.905) 2(-2.4,0.635) 3(-2.4,-0.635) 4(-2.4,-1.905) 5(2.4,-1.905) 6(2.4,-0.635) 7(2.4,0.635) 8(2.4,1.905)
  silkscreen extent -2.52,-2.5 0.9,2.88, body extent -2,-2.5 2,2.5, height 1.75
SOIC127P600-14N [mm] "SOIC, 14-Leads, Body 8.7x3.9mm, Pitch 1.27mm, IPC Medium Density"
  oval 2.2x0.6 smd: 1(-2.4,3.81) 2(-2.4,2.54) 3(-2.4,1.27) 4(-2.4,0) 5(-2.4,-1.27) 6(-2.4,-2.54) 7(-2.4,-3.81) 8(2.4,-3.81) 9(2.4,-2.54) 10(2.4,-1.27) 11(2.4,0) 12(2.4,1.27) 13(2.4,2.54) 14(2.4,3.81)
  silkscreen extent -2.52,-4.4 0.9,4.78, body extent -2,-4.38 2,4.38, height 1.75
SOT23-3N [mm] "SOT23, 3-Leads, Body 2.9x1.3mm, Pitch 0.95mm, Lead Span 2.5mm, IPC Medium Density"
  rrect50% 1.5x0.6 smd: 1(-0.95,0.95) 2(-0.95,-0.95) 3(0.95,0)
  silkscreen extent 0.1,-1.5 0.7,1.5, body extent -0.7,-1.5 0.7,1.5, height 1.1
SOT23-5N [mm] "SOT23, 5-Leads, Body 3.0x3.0mm (max), Pitch 0.95mm, IPC Medium Density"
  rrect50% 1.1x0.6 smd: 1(-1.2,0.95) 2(-1.2,0) 3(-1.2,-0.95) 4(1.2,-0.95) 5(1.2,0.95)
  silkscreen extent -1.32,-1.5 0.25,1.92, body extent -1.37,-1.5 1.38,1.5, height 1.03
SOT23-6N [mm] "SOT23, 6-Leads, Body 3.0x1.7mm (max), Pitch 0.95mm, IPC Medium Density"
  rrect50% 1.1x0.6 smd: 1(-1.2,0.95) 2(-1.2,0) 3(-1.2,-0.95) 4(1.2,-0.95) 5(1.2,0) 6(1.2,0.95)
  silkscreen extent -1.32,-1.5 0.25,1.9, body extent -0.85,-1.5 0.85,1.5, height 1.22
TQFP44-0.8 [mm] "TQFP, 44-Leads, Body 10.00x10.00mm, Pitch 0.80mm, IPC Medium Density"
  oval 1.6x0.55 smd: 1(-5.65,4) 2(-5.65,3.2) 3(-5.65,2.4) 4(-5.65,1.6) 5(-5.65,0.8) 6(-5.65,0) 7(-5.65,-0.8) 8(-5.65,-1.6) 9(-5.65,-2.4) 10(-5.65,-3.2) 11(-5.65,-4) 23(5.65,-4) 24(5.65,-3.2) 25(5.65,-2.4) 26(5.65,-1.6) 27(5.65,-0.8) 28(5.65,0) 29(5.65,0.8) 30(5.65,1.6) 31(5.65,2.4) 32(5.65,3.2) 33(5.65,4)
  oval 0.55x1.6 smd: 12(-4,-5.65) 13(-3.2,-5.65) 14(-2.4,-5.65) 15(-1.6,-5.65) 16(-0.8,-5.65) 17(0,-5.65) 18(0.8,-5.65) 19(1.6,-5.65) 20(2.4,-5.65) 21(3.2,-5.65) 22(4,-5.65) 34(4,5.65) 35(3.2,5.65) 36(2.4,5.65) 37(1.6,5.65) 38(0.8,5.65) 39(0,5.65) 40(-0.8,5.65) 41(-1.6,5.65) 42(-2.4,5.65) 43(-3.2,5.65) 44(-4,5.65)
  silkscreen extent -5.77,-4.45 4.45,4.95, body extent -5,-5 5,5, height 1.2
XTAL3.2X2.5 [mm] "Crystal, SMD 3.2x2.5mm"
  rrect25% 1.4x1.2 smd: 1(-1.1,-0.85) 2(1.1,-0.85) 3(1.1,0.85) 4(-1.1,0.85)
  silkscreen extent -2.12,-1.97 1.6,1.7, body extent -1.6,-1.25 1.6,1.25, height 1.3

## Part data
C1 C2 C3 C6 C9 C10 C11 C12 C13 C16 C19 C21 C24 C25 C27 C28 C35 C36: library part C0603C104K3RACTU, Dist=Digi-Key, Dist P/N=399-1281-1-ND, Mfg=Kemet, Mfgr P/N=C0603C104K3RACTU, Price=0.079
C4: library part C1608X7R1H103J, Dist=Digi-Key, Dist P/N=445-1348-1-ND, Mfg=TDK, Mfgr P/N=C1608X7R1H103J, Price=0.047
C7 C8 C17: library part CC0603KRX7R9BB104, Dist=Digi-Key, Dist P/N=311-1344-1-ND, Mfg=Yageo, Mfgr P/N=CC0603KRX7R9BB104, Price=0.35
C14 C15 C18 C20 C29 C30: library part C1608X5R1E105K, Dist=Digi-Key, Dist P/N=445-5146-1-ND, Mfg=TDK, Mfgr P/N=C1608X5R1E105K, Price=0.093
C22 C23: library part GRM1885C1H200JA01D, Dist=Digi-Key, Dist P/N=490-1410-1-ND, HelpURL=http://search.murata.co.jp/Ceramy/image/img/A18X/C2ED01.pdf, Mfg=Murata, Mfgr P/N=GRM1885C1H200JA01D, Price=0.06
C26 C32: library part C1608X5R0J106M, Dist=Digi-Key, Dist P/N=445-4112-1-ND, HelpURL=http://www.tdk.com/pdf/general_B11.pdf, Mfg=TDK, Mfgr P/N=C1608X5R0J106M, Price=0.46
C33: library part CL10A105KB8NNNC, Dist=Digi-Key, Dist P/N=1276-1860-1-ND, Mfg="Samsung Electro-Mechanics", Mfgr P/N=CL10A105KB8NNNC, Price=0.28
C34: library part CGA2B2C0G1H101J050BA, Dist=Digi-Key, Dist P/N=445-5596-1-ND, HelpURL=http://www.tdk.com/pdf/general_A11.pdf, Mfg=TDK, Mfgr P/N=CGA2B2C0G1H101J050BA, Price=0.15
D2: library part MMSZ5252B-TP, Datasheet=http://61.222.192.61/mccsemi/up_pdf/MMSZ5221-MMSZ5259(SOD123).pdf, Dist=Digi-Key, Dist P/N=MMSZ5252B-TPMSCT-ND, Mfg=MCC, Mfgr P/N=MMSZ5252B-TP, Price=0.40
D3 D4: library part BAT54S,215, Datasheet=http://www.nxp.com/documents/data_sheet/BAT54_SERIES.pdf, Dist=Digi-Key, Dist P/N=568-1614-1-ND, Mfg="NXP Semiconductors", Mfgr P/N=BAT54S,215, Price=0.47
D5 D6 D7: library part BZT52C10-TP, Datasheet=http://61.222.192.61/mccsemi/up_pdf/MMSZ5221-MMSZ5259(SOD123).pdf, Dist=Digi-Key, Dist P/N=BZT52C10-TPMSCT-ND, Mfg=MCC, Mfgr P/N=BZT52C10-TP, Price=0.38
D8: library part "LS Q971-KN-1", Dist=Digi-Key, Dist P/N=475-3016-1-ND, HelpURL=http://catalog.osram-os.com/catalogue/catalogue.do;jsessionid=9BFE627FDBFBCB7D1CA4E61E5C2777C5?act=downloadFile&favOid=0200000600004f6a000100b6, Mfg=Osram, Mfgr P/N="LS Q971-KN-1", Price=0.08
D9: library part "LG Q971-KN-1", Dist=Digi-Key, Dist P/N=475-1409-1-ND, HelpURL=http://catalog.osram-os.com/catalogue/catalogue.do;jsessionid=60BD7AD44689CBF6EBE1906F01C7D3CB?act=downloadFile&favOid=0200000300015082000200b6, Mfg=Osram, Mfgr P/N="LG Q971-KN-1", Price=0.11
F8 F9 F10: library part 0ZCA0005FF2E, Dist=Digi-Key, Dist P/N=507-1476-1-ND, HelpURL=http://www.belfuse.com/Data/Datasheets/0ZCA.pdf, Mfg="Bel Fuse", Mfgr P/N=0ZCA0005FF2E, Price=0.28
H1 H2 H3 H4 H5 H6: library part "Hole Mounting"
J1 J2: library part B2B-EH-A(LF)(SN), Dist=Digi-Key, Dist P/N=455-1611-ND, HelpURL=http://www.jst-mfg.com/product/pdf/eng/eEH.pdf, Mfg=JST, Mfgr P/N=B2B-EH-A(LF)(SN), Price=0.13
J3: library part B5B-ZR(LF)(SN), Dist=Digi-Key, Dist P/N=455-1660-ND, HelpURL=http://www.jst-mfg.com/product/pdf/eng/eZH.pdf, Mfg=JST, Mfgr P/N=B5B-ZR(LF)(SN), Price=0.2
J5: library part B4B-EH-A(LF)(SN), Dist=Digi-Key, Dist P/N=455-1613-ND, HelpURL=http://www.jst-mfg.com/product/pdf/eng/eEH.pdf, Mfg=JST, Mfgr P/N=B4B-EH-A(LF)(SN), Price=0.19
J6: library part B8B-EH-A(LF)(SN), Dist=Digi-Key, Dist P/N=455-1617-ND, HelpURL=http://www.jst-mfg.com/product/pdf/eng/eEH.pdf, Mfg=JST, Mfgr P/N=B8B-EH-A(LF)(SN), Price=0.32
J7: library part B2B-ZR(LF)(SN), Dist=Digi-Key, Dist P/N=455-1657-ND, HelpURL=http://www.jst-mfg.com/product/pdf/eng/eZH.pdf, Mfg=JST, Mfgr P/N=B2B-ZR(LF)(SN), Price=0.11
J8: library part S8B-XH-A(LF)(SN)_CUST, Dist=Digi-Key, Dist P/N=455-2240-ND, HelpURL=http://www.jst-mfg.com/product/pdf/eng/eXH.pdf, Mfg=JST, Mfgr P/N=S7B-XH-A(LF)(SN), Price=0.43
J9: library part S2B-EH(LF)(SN), Dist=Digi-Key, Dist P/N=455-1625-ND, HelpURL=http://www.jst-mfg.com/product/pdf/eng/eEH.pdf, Mfg=JST, Mfgr P/N=S2B-EH(LF)(SN), Price=0.16
L1: library part MI0603J601R-10, Dist=Digi-Key, Dist P/N=240-2371-1-ND, HelpURL=http://www.steward.com/view_print.asp?St_PartNo=MI0603J601R-10, Mfg=Laird, Mfgr P/N=MI0603J601R-10, Price=0.087
L2: library part MDWK4040T1R0MM, Dist=Digi-Key, Dist P/N=SDR0403-102KLCT-ND, HelpURL=https://www.bourns.com/docs/Product-Datasheets/sdr0403.pdf, Mfg=Bourns, Mfgr P/N=SDR0403-102KL, Price=0.69
Q1 Q3 Q6 Q8 Q10 Q12: library part MMBTA64-7-F, Dist=Digi-Key, Dist P/N=MMBTA64-FDICT-ND, HelpURL=http://www.diodes.com/datasheets/ds30055.pdf, Mfg="Diodes Inc", Mfgr P/N=MMBTA64-7-F, Price=0.27
Q2 Q4 Q5 Q7 Q9 Q11 Q13: library part MMBT3904, Datasheet=http://www.fairchildsemi.com/ds/MM/MMBT3904.pdf, Dist=Digi-Key, Dist P/N=MMBT3904FSCT-ND, Mfg=Fairchild, Mfgr P/N=MMBT3904, Price=0.37
Q14: library part 2N7002, Datasheet=http://www.fairchildsemi.com/ds/2N/2N7000.pdf, Dist=Digi-Key, Dist P/N=2N7002NCT-ND, Mfg="Fairchild Semiconductor", Mfgr P/N=2N7002, Price=0.56
R1 R5 R17 R23 R36 R41 R53 R63 R114: library part ERJ-3EKF4993V, Dist=Digi-Key, Dist P/N=P499KHCT-ND, Mfg=Panasonic, Mfgr P/N=ERJ-3EKF4993V, Price=0.05
R2 R6 R9 R20 R22 R24 R37 R38 R40 R52 R54 R55 R56 R68 R69 R81 R84 R92 R93 R94 R99 R104 R109 R112 R113: library part ERJ-3EKF1002V, Dist=Digi-Key, Dist P/N=P10.0KHCT-ND, Mfg=Panasonic, Mfgr P/N=ERJ-3EKF1002V, Price=0.05
R3 R18 R34 R50 R51 R66 R67 R76 R77 R82 R83 R100 R101 R105 R106: library part ERJ-3EKF1003V, Dist=Digi-Key, Dist P/N=P100KHCT-ND, Mfg=Panasonic, Mfgr P/N=ERJ-3EKF1003V, Price=0.05
R4 R19 R35 R80: library part ERJ-3EKF2803V, Dist=Digi-Key, Dist P/N=P280KHCT-ND, Mfg=Panasonic, Mfgr P/N=ERJ-3EKF2803V, Price=0.05
R7 R10 R25 R27 R48 R49 R64 R65: library part ERJ-3EKF2003V, Dist=Digi-Key, Dist P/N=P200KHCT-ND, Mfg=Panasonic, Mfgr P/N=ERJ-3EKF2003V, Price=0.05
R8: library part ERJ-3EKF1001V, Dist=Digi-Key, Dist P/N=P1.00KHCT-ND, Mfg=Panasonic, Mfgr P/N=ERJ-3EKF1001V, Price=0.05
R11 R12 R13 R28 R29 R30 R42 R43 R44 R57 R58 R59 R70 R71 R72 R85 R86 R87 R91: library part ERJ-8ENF1210V, Dist=Digi-Key, Dist P/N=P121FCT-ND, HelpURL=http://industrial.panasonic.com/www-cgi/jvcr13pz.cgi?E+PZ+3+AOA0002+ERJ8ENF22R1V+7+WW, Mfg=Panasonic, Mfgr P/N=ERJ-8ENF1210V, Price=0.10
R14: library part ERJ-3EKF3162V, Dist=Digi-Key, Dist P/N=P31.6KHCT-ND, Mfg=Panasonic, Mfgr P/N=ERJ-3EKF3162V, Price=0.05
R21: library part ERJ-3EKF2321V, Dist=Digi-Key, Dist P/N=P2.32KHCT-ND, Mfg=Panasonic, Mfgr P/N=ERJ-3EKF2321V, Price=0.05
R26: library part ERJ-3EKF4991V, Dist=Digi-Key, Dist P/N=P4.99KHCT-ND, Mfg=Panasonic, Mfgr P/N=ERJ-3EKF4991V, Price=0.05
R39 R107 R108 R110: library part ERJ-3EKF1200V, Dist=Digi-Key, Dist P/N=P120HCT-ND, Mfg=Panasonic, Mfgr P/N=ERJ-3EKF1200V, Price=0.05
R78: library part ERJ-3EKF3322V, Dist=Digi-Key, Dist P/N=P3.32KHCT-ND, Mfg=Panasonic, Mfgr P/N=ERJ-3EKF3322V, Price=0.05
R79: library part ERJ-3EKF1503V_1, Dist=Digi-Key, Dist P/N=P150KHCT-ND, Mfg=Panasonic, Mfgr P/N=ERJ-3EKF1503V, Price=0.05
R95 R96: library part ERJ-3EKF4990V, Dist=Digi-Key, Dist P/N=P499HCT-ND, Mfg=Panasonic, Mfgr P/N=ERJ-3EKF4990V, Price=0.05
R97 R102: library part ERJ-3EKF6652V, Dist=Digi-Key, Dist P/N=P66.5KHCT-ND, Mfg=Panasonic, Mfgr P/N=ERJ-3EKF6652V, Price=0.05
R98 R103: library part ERJ-3EKF1000V, Dist=Digi-Key, Dist P/N=P100HCT-ND, Mfg=Panasonic, Mfgr P/N=ERJ-3EKF1000V, Price=0.05
U1: library part LP324DR, Dist=Digi-Key, Dist P/N=296-17953-1-ND, HelpURL=http://www.ti.com/lit/ds/symlink/lp2902.pdf, Mfg=TI, Mfgr P/N=LP324DR, Price=0.62
U2: library part TCMT1600, Dist=Digikey, Dist P/N=751-1374-1-ND, HelpURL=http://www.vishay.com/doc?83512, Mfg=Vishay, Mfgr P/N=TCMT1600, Price=0.73
U4: library part MCP1804T-5002I/OT, Dist=Digi-Key, Dist P/N=MCP1804T-5002I/OTCT-ND, HelpURL=http://ww1.microchip.com/downloads/en/DeviceDoc/22200C.pdf, Mfg=Microchip, Mfgr P/N=MCP1804T-5002I/OT, Price=0.80
U5: library part ISO1050DUBR, Dist=Digi-Key, Dist P/N=296-24818-1-ND, HelpURL=http://www.ti.com/lit/ds/symlink/iso1050.pdf, Mfg=TI, Mfgr P/N=ISO1050DUBR, Price=4.02
U6: library part PESD1CAN,215, Dist=Digi-Key, Dist P/N=568-4032-1-ND, HelpURL=http://www.nxp.com/documents/data_sheet/PESD1CAN.pdf, Mfg=NXP, Mfgr P/N=PESD1CAN,215, Price=0.44
U7: "IC ADC I2C 16-Bit 15SPS SOT23-6", Dist=Digikey, Dist P/N=MCP3425A0T-E/CHCT-ND, HelpURL=http://ww1.microchip.com/downloads/en/DeviceDoc/22072B.pdf, Mfg=Microchip, Mfgr P/N=MCP3425A0T-E/CH, Price=2.60
U8: library part LP358DR, Dist=Mouser, Dist P/N=595-LP358DR, HelpURL=http://www.ti.com/litv/slos475, Mfg="Texas Instruments", Mfgr P/N=LP358DR, Price=0.642
U9: library part DSPIC33EP32GP504-I/PT, Dist=Digi-Key, Dist P/N=DSPIC33EP32GP504-I/PT-ND, HelpURL=http://ww1.microchip.com/downloads/en/DeviceDoc/70657g.pdf, Mfg=Microchip, Mfgr P/N=DSPIC33EP32GP504-I/PT, Price=3.70
U10: library part ISL21080CIH320Z-TK, Dist=Digi-Key, Dist P/N=ISL21080CIH320Z-TKCT-ND, Mfg=Intersil, Mfgr P/N=ISL21080CIH320Z-TK, Price=1.69
U11: library part TPS54062DGKR, Dist=Digi-Key, Dist P/N=296-28780-1-ND, HelpURL=http://www.ti.com/general/docs/suppproductinfo.tsp?distId=10&gotoUrl=http%3A%2F%2Fwww.ti.com%2Flit%2Fgpn%2Ftps54062, Mfg=TI, Mfgr P/N=TPS54062DGKR, Price=2.25
U12: library part 24LC16BT-I/OT, Dist=Digikey, Dist P/N=24LC16BT-I/OTCT-ND, HelpURL=http://www.microchip.com/mymicrochip/filehandler.aspx?ddocname=en011855, Mfg=Microchip, Mfgr P/N=24LC16BT-I/OT, Price=0.38
X1: library part ABM8G-20.000MHZ-4Y-T3, Dist=Digi-Key, Dist P/N=535-10911-1-ND, HelpURL=http://www.abracon.com/Resonators/ABM8G.pdf, Mfg=Abracon, Mfgr P/N=ABM8G-20.000MHZ-4Y-T3, Price=1.01

## Via types
v1: diameter 0.8, hole 0.4, Top Layer to Bottom Layer, tented both sides, 96 vias

## Nets (pads, with @x,y where several pads share a name; then routed paths per layer and width w, separated by ;. In a path a pad name is that pad's centre, name@x,y a point inside that pad or via, vN(x,y) a via of type N, cw(c..) or ccw(c..) an arc to the next point about the centre after c; other vN are vias at no path point)
ANALOG1: F8.2 J6.6 | length 4.6
  Top Layer w0.2: J6.6@71.3,125.05 72.75,125.05 74.5,123.3 F8.2@75.15,123.3
ANALOG1PWM: R99.1 U9.44 | length 11.2
  Top Layer w0.2: R99.1@95.45,120.5 95.45,119.25 98.4,116.3 100.331,116.3 101.631,115 U9.44@103.65,115
ANALOG2: F9.2 J6.4 | length 4.4
  Top Layer w0.2: J6.4@71.3,120.05 72.65,120.05 74,118.7 F9.2@75.15,118.7
ANALOG2PWM: R104.1 U9.43 | length 13.9
  Top Layer w0.2: R104.1@95.45,123.8 96.5,122.75 96.5,118.766 98.266,117 100.3,117 101,116.3 101,116.21 101.41,115.8 U9.43@103.65,115.8
AVDD: C14.1 C24.1 C29.1 D3.2 D4.2 L1.2 U7.5 U9.17 U10.1 | length 75.1
  Top Layer w0.2: D3.2@80.35,127.85 81.5,129 81.5,130.2 81.3,130.4 v1(80.5,130.4) 80.35,130.55 D4.2@80.35,131.35 ; U7.5@85,131.1 85,131.7 85.4,132.1 86.9,132.1 ; v1(87.6,132.8) 86.9,132.1 ; C14.1@88.8,131.5 87.6,131.5 87,132.1 86.9,132.1
  Top Layer w0.4: U9.17@114.95,119 115.8,119 116.5,119.7 C29.1@116.9,119.7 117.4,120.2 118.1,120.2 119.9,122 119.9,126.2 C24.1@119.6,126.5 v1(117.85,126.5) ; U10.1@116.25,126.15 117.45,126.15 117.8,126.5 v1(117.85,126.5) ; L1.2@117.1,127.8 117.1,127.25 v1(117.85,126.5)
  Bottom Layer w0.2: v1(80.5,130.4) 83.9,130.4 86.3,132.8 v1(87.6,132.8)
  Bottom Layer w0.3: v1(87.6,132.8) 87.6,133.1 88.3,133.8 92.5,133.8 95.9,130.4 98.6,130.4 99.5,129.5 105.1,129.5 109.1,133.5 115.7,133.5 116.8,132.4 116.8,131 116.4,130.6 116.4,127.95 v1(117.85,126.5)
BAL1: J8.6 Q12.2 R70.1 R71.1 R72.1 R77.2 R79.2 | length 54.5
  Top Layer w0.2: R79.2@120.6,139.15 v1(120.6,140.3) ; R77.2@149.65,140.9 149.65,140.05 150.9,138.8 150.9,137.9 149.95,136.95
  Top Layer w0.4: v1(139.3,133.55) R70.1@139.3,134.85
  Top Layer w0.6: R70.1@139.3,134.85 R72.1@144.8,134.85 ; R71.1@142.05,134.85 R72.1@144.8,134.85 ; J8.6@153.6,127.45 152,129.05 152,133.1 150.8,134.3 150.8,136.1 149.95,136.95 149.45,137.45 Q12.2@147.85,137.45 147.4,137.45 R72.1@144.8,134.85
  Bottom Layer w0.2: v1(120.6,140.3) 127.35,133.55 v1(139.3,133.55)
BAL2: J8.5 Q10.2 R57.1 R58.1 R59.1 R63.1 R66.2 R76.2 | length 114.1
  Top Layer w0.2: R76.2@115.6,135.85 v1(115.6,137) ; v1(139.3,128.05) R57.1@139.3,129.35 ; R66.2@149.65,135.4 149.65,134.45 150.8,133.3 150.8,132.4 149.95,131.55
  Top Layer w0.4: R63.1@119.4,112.85 119.55,112.85 v1(120.7,111.7)
  Top Layer w0.6: R57.1@139.3,129.35 R59.1@144.8,129.35 ; R58.1@142.05,129.35 R59.1@144.8,129.35 ; J8.5@153.6,124.95 152.025,126.525 152.025,127.775 151.1,128.7 151.1,130.4 149.55,131.95 Q10.2@147.85,131.95 147.4,131.95 R59.1@144.8,129.35
  Bottom Layer w0.2: v1(115.6,137) 117,137 118.4,138.4 120.1,138.4 125.7,132.8 134,132.8 134.8,132 134.8,129.5 136.25,128.05 v1(139.3,128.05)
  Bottom Layer w0.4: v1(120.7,111.7) 121.1,111.3 122.8,111.3 125.7,108.4 125.7,105.1 126.3,104.5 132.1,104.5 134.4,106.8 134.4,109.3 136.8,111.7 148.2,111.7 149,112.5 149,120.3 153.575,124.875 J8.5@153.575,124.975
BAL3: J8.4 Q8.2 R41.1 R42.1 R43.1 R44.1 R50.2 R53.1 | length 90
  Top Layer w0.2: R53.1@114.4,107.194 114.4,106.85 115.3,105.95 115.3,104.5 115.2,104.4 113.8,104.4 113.1,103.7 v1(113.1,103.2) 113.7,102.6 114.2,102.6 114.55,102.25 R41.1@114.55,101.6 ; R50.2@149.65,129.9 149.65,128.95 150.8,127.8 150.8,127 149.95,126.15 149.85,126.15
  Top Layer w0.6: R42.1@139.3,123.85 R43.1@142.05,123.85 R44.1@144.8,123.85 147.4,126.45 Q8.2@147.85,126.45 149.55,126.45 149.85,126.15 153.55,122.45 J8.4@153.6,122.45 ; R50.2@149.65,129.9 R50.2@149.75,129.9
  Bottom Layer w0.2: v1(113.1,103.2) 117.4,103.2 122.7,108.5 124.4,108.5 125,107.9 125,105 126.3,103.7 132.7,103.7 135.3,106.3 135.3,109.1 137.2,111 148.7,111 149.8,112.1 149.8,118.6
  Bottom Layer w0.4: 149.8,118.6 J8.4@153.625,122.425